# Altium PCB EFR32xG1x_DISC_REF_DES_A00.PcbDoc (part 2 of 2)
Units mil, origin at the board's own origin, x right, y up, seen from the top; angles counter-clockwise.
Board outline 1181.1 x 1771.65 mil, 4 copper layers (Top Layer, Signal Layer 2, Signal Layer 3, Bottom Layer), stack 63.229 mil thick; 88 components, 86 nets, 332 pads, 389 vias.
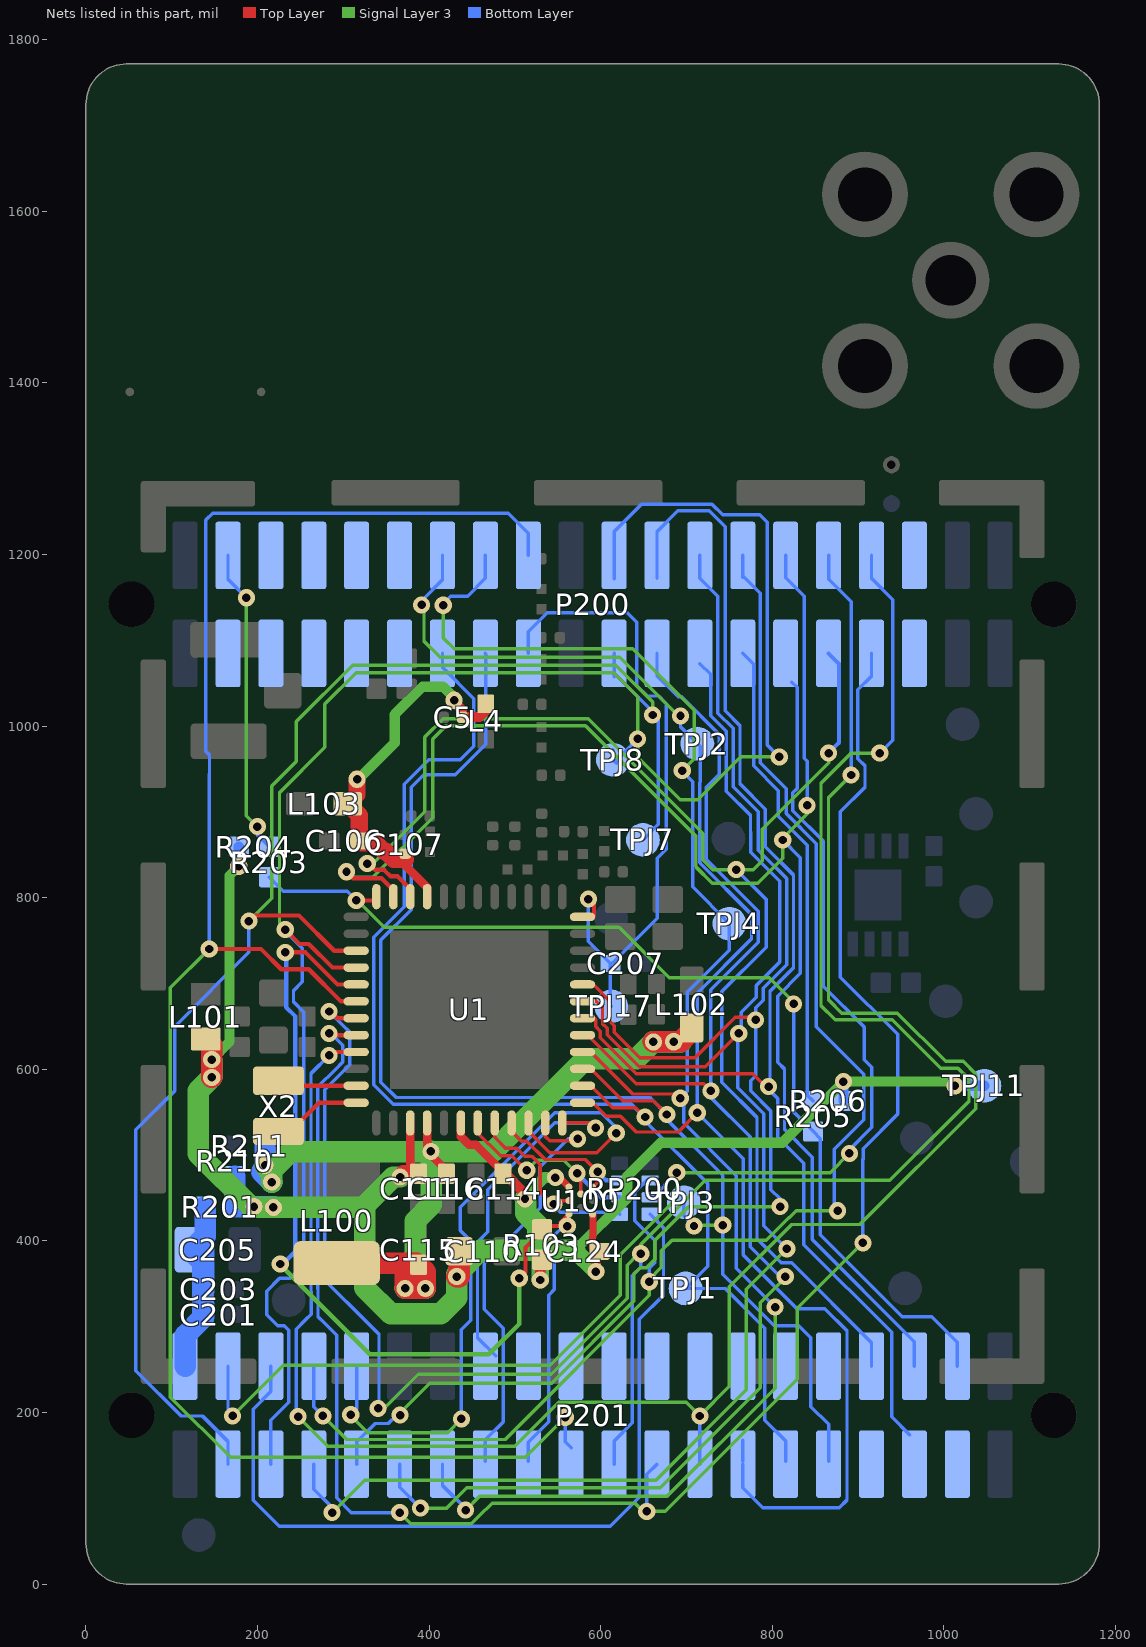
[diagram p4: the nets of this part, all layers, seen from the top]

## Via types
v1: diameter 20, hole 9.84, Top Layer to Bottom Layer, tented both sides, 385 vias
v2: diameter 19.68, hole 9.84, Top Layer to Bottom Layer, tented both sides, 2 vias
v3: diameter 20, hole 9.84, Top Layer to Bottom Layer, 2 vias

## Nets (pads, with @x,y where several pads share a name; then routed paths per layer and width w, separated by ;. In a path a pad name is that pad's centre, name@x,y a point inside that pad or via, vN(x,y) a via of type N, cw(c..) or ccw(c..) an arc to the next point about the centre after c; other vN are vias at no path point) (continued)
RADIO_PA2: P200.21 P201.3 TPJ7.1 U1.27 | length 1872.5
  Top Layer w5: v1(189.96,772.64) 196.62,779.3 248.26,779.3 289.37,738.19 U1.27@314.96,738.19
  Signal Layer 3 w4: v1(189.96,772.64) 216.54,799.21 216.54,930.12 245.08,958.66 245.08,1005.27 310.81,1071 617.48,1071 660.47,1028.01 v1(660.47,1012.84)
  Bottom Layer w4: P201.3@165.55,139.76 165.55,166.14 135.83,195.87 110.94,195.87 58.07,248.73 58.07,529.33 103.35,574.6 103.35,649.61 189.96,736.22 v1(189.96,772.64) ; P200.21@615.55,1057.68 P200.21@615.55,1061.61 ; P200.21@615.55,1084.65 P200.21@615.55,1061.61 ; TPJ7.1@649.21,867.32 657.73,875.84 657.48,876.1 667,885.62 667,1006.31 v1(660.47,1012.84) 660.47,1016.7 P200.21@615.55,1061.61
RADIO_PA3: P200.22 P201.5 TPJ8.1 U1.28 | length 2331
  Top Layer w5: v1(232.28,762.8) 249.02,746.06 259.76,746.06 287.32,718.5 U1.28@314.96,718.5
  Signal Layer 3 w4: v1(232.28,762.8) 225.59,769.48 225.59,922.44 278.54,975.39 278.54,1025.69 314.86,1062 615.17,1062 643,1034.17 v1(643,985) 643,963.69 692.69,914 713,914 763,964 v1(808,964)
  Bottom Layer w4: P201.5@215.55,139.76 215.55,191.13 236.12,211.7 236.12,287.4 ; v1@235.24,757.86 252.22,740.88 252.22,702.01 241.87,691.67 241.87,678.41 253.94,666.35 253.94,372.05 238.28,356.39 225.58,356.39 210.54,341.35 210.54,314.07 223.33,301.28 230.9,301.28 236.22,295.95 236.22,287.4 ; TPJ8.1@614.17,972.44 TPJ8.1@614.17,960.63 618.36,956.45 618.36,960.36 v1(643,985) ; P200.22@615.55,1171.85 P200.22@615.55,1198.82 615.55,1226.77 647.51,1258.73 729.64,1258.73 742.21,1246.16 785.34,1246.16 794.12,1237.38 794.12,977.88 v1(808,964)
RADIO_PA4: P201.17 R103.2 U1.29 U100.A3 | length 1280.2
  Top Layer w5: v1(232.28,736.22) 255.83,736.22 293.23,698.82 U1.29@314.96,698.82 ; v1(504.95,356.32) 512.41,363.78 512.41,392.33 531.5,411.42 R103.2@531.5,413.39 535.3,417.19 v1@557.14,417.19 ; v1(560.93,417.19) v1@557.14,417.19 ; U100.A3@562.91,431.1 553.07,421.26 v1@557.14,417.19
  Signal Layer 3 w5: v1(226.38,373.03) 226.38,372.05 330.71,267.72 469.5,267.72 504.95,303.16 v1(504.95,356.32)
  Bottom Layer w4: P201.17@515.55,143.11 515.55,165.16 539.37,188.98 539.37,253.47 ; 539.17,253.66 539.37,253.47 ; v1(560.93,417.19) 556.88,417.19 546.04,406.35 546.04,343.28 539.37,336.61 539.37,253.47
  Bottom Layer w5: v1@227.36,371.06 227.85,371.56 244.09,387.8 244.09,661.42 233.37,672.14 233.37,734.36 233.3,734.29 232.28,735.31 v1(232.28,736.22)
RADIO_PA5: P200.18 P201.19 U1.30 | length 2200.8
  Top Layer w5: v1(143.7,740.16) 204.07,740.16 227.7,716.54 259.76,716.54 297.17,679.13 U1.30@314.96,679.13
  Signal Layer 3 w4: v1(143.7,740.16) 98.43,694.88 98.43,217.85 168.63,147.64 511.81,147.64 v1(558.58,194.41)
  Bottom Layer w4: v1(143.7,740.16) 143.7,943.91 143.95,944.16 143.95,966.28 139.76,970.47 139.76,1240.16 147.64,1248.03 492.13,1248.03 515.55,1224.61 P200.18@515.55,1198.82 ; v1(558.58,194.41) 558.58,165.95 P201.19@565.55,158.98
RADIO_PB11: P200.34 P201.21 U1.31 | length 2490.7
  Top Layer w5: v1(283.39,667.32) 285.36,667.32 293.23,659.45 U1.31@314.96,659.45
  Signal Layer 3 w4: v1@344,201.28 387.3,244.59 542.08,244.59 630.78,333.29 630.78,371.78 643.86,384.86 v1(646.69,384.86) 646.69,395.7 721.54,470.55 937.01,470.55 1029.15,562.69 1029.15,588.58 1016.35,601.38 996.05,601.38 939.95,657.48 873.07,657.48 856.66,673.89 856.66,933.51 891.65,968.5 v1(925.2,968.5)
  Bottom Layer w4: v1(283.39,667.32) 299.39,651.32 299.47,651.32 307.39,643.4 307.39,605.13 278.54,576.28 278.54,354.24 303.6,329.18 303.69,329.18 341.54,291.34 341.54,205.71 v1(340.55,204.72) ; P201.21@615.55,139.76 615.55,166.73 636.81,187.99 636.81,359.25 646.69,369.13 v1(646.69,384.86) ; P200.34@915.55,1198.82 915.55,1172.09 940.21,1147.43 940.21,983.52 v1(925.2,968.5)
RADIO_PB12: P200.33 P201.23 U1.32 | length 2239.1
  Top Layer w5: v1(283.39,641.73) 285.35,639.76 U1.32@314.96,639.76
  Signal Layer 3 w4: v1(365.67,83.19) 378.68,70.14 449.08,70.14 453.74,74.8 458.44,79.51 473.3,94.36 639.89,94.36 653.54,80.71 v1(653.54,84.65) 675.2,84.65 829.23,238.68 829.23,321.36 v1(905.51,397.64)
  Bottom Layer w4: v1(283.39,641.73) v1@284.41,640.71 ; v1@285.43,641.73 285.61,641.73 299.39,627.95 299.39,608.44 291,600.05 270.29,579.35 270.29,344.39 270.42,344.26 270.42,311.76 277.3,304.87 292.19,289.98 292.19,100.44 309.44,83.19 v1(365.67,83.19) ; v1(653.54,84.65) 653.54,127.75 P201.23@665.55,139.76 ; v1(905.51,397.64) 905.51,495.09 905.76,495.34 905.76,507.56 946,547.79 946,640.61 879.2,707.42 879.2,899.86 907.99,928.65 907.99,953.74 899.73,962 899.73,1042.45 915.55,1058.27 P200.33@915.55,1084.65
RADIO_PB13: P200.32 P201.25 U1.33 | length 2362.4
  Top Layer w5: v1(283.39,616.14) 283.39,618.11 281.42,620.08 U1.33@314.96,620.08
  Signal Layer 3 w4: v1(247.31,195.1) 281.97,160.44 499.61,160.44 551.18,212.01 699.41,212.01 v1(715.55,195.87) 750,230.31 750,346.45 822.59,419.04 902.06,419.04 1037.15,554.13 1037.15,594.49 1022.26,609.38 1001.85,609.38 945.75,665.48 880.87,665.48 865.43,680.93 865.43,916.61 v1(891.73,942.91)
  Bottom Layer w4: v1@244.98,200.24 244.98,297.15 255.85,308.02 262.39,314.56 262.39,340.97 262.29,341.08 262.29,595.05 v1(283.39,616.14) ; P201.25@715.55,139.76 v1(715.55,195.87) ; P200.32@865.55,1198.82 865.55,1170.91 891.73,1144.73 v1(891.73,942.91)
RADIO_PB14: U1.35 X2.2 | length 93
  Top Layer w5: X2.2@224.33,586.61 230.24,580.71 U1.35@314.96,580.71
RADIO_PB15: U1.36 X2.1 | length 104.4
  Top Layer w5: X2.1@224.33,527.56 238.11,527.56 271.57,561.02 U1.36@314.96,561.02
RADIO_PC6: RP200.2 U1.43 U100.D2 | length 243.9
  Top Layer w4: U1.43@456.61,537.4 456.61,525.59 483.2,499 496.44,499 513.16,482.28 v1(513.7,482.28) ; v1(572.38,478.78) 576.69,474.46 U100.D2@576.69,454.72
  Signal Layer 3 w4: v1(513.7,482.28) 525.51,494.09 557.06,494.09 v1(572.38,478.78)
  Bottom Layer w5: v1(572.38,478.78) 600.37,450.79 RP200.2@622.05,450.79
RADIO_PC7: RP200.1 U1.44 U100.C3 | length 228.3
  Top Layer w4: U1.44@476.38,537.4 476.3,520.7 489,508 502,508 511.65,498.35 517.82,498.35 517.88,498.28 520.33,498.28 529.7,488.91 529.7,475.66 529.45,475.4 529.45,456.69 v1@537.32,448.82 ; v1(545.28,442.91) 549.21,446.85 U100.C3@562.91,446.85
  Bottom Layer w4: v1@544.25,441.89 552.95,433.19 619.96,433.19 RP200.1@622.05,431.1
RADIO_PC8: RP200.3 U1.45 U100.E1 | length 179.7
  Top Layer w4: U1.45@496.06,537.4 495.98,527.64 507.62,516 513.92,516 535.15,494.78 581.91,494.78 v1(596.38,480.31) 596.38,468.5 U100.E1@590.47,462.6
  Bottom Layer w5: v1(596.38,480.31) 606.22,470.47 RP200.3@622.05,470.47
RADIO_PC9: P201.10 U1.46 | length 831
  Top Layer w4: U1.46@515.75,537.4 515.75,527.56 540.53,502.78 595.22,502.78 v1(618.03,525.59)
  Signal Layer 3 w4: v1(308.58,197.36) 308.58,196.39 328.53,176.44 421.52,176.44 v1(437.52,192.44)
  Bottom Layer w4: v1(308.58,197.36) 315.55,204.33 P201.10@315.55,253.94 ; v1@437.52,194.26 437.52,296.58 448.32,307.38 448.32,400.11 436.38,412.05 436.38,439.33 546.26,549.21 600.39,549.21 618.03,531.57 v1(618.03,525.59)
RADIO_PC10: P201.15 U1.47 | length 501
  Top Layer w4: U1.47@535.43,537.4 535.43,521.57 540.36,516.64 570.88,516.64 v1(573.02,518.78)
  Bottom Layer w4: P201.15@465.55,143.11 465.55,168.31 486.12,188.87 486.12,298.33 464.32,320.13 464.32,373.76 529.28,438.72 529.28,475.23 529.7,475.66 529.7,486.39 562.09,518.78 v1(573.02,518.78)
RADIO_PC11: P201.16 U1.48 | length 409
  Top Layer w4: U1.48@555.04,537.4 U1.48@555.12,537.4 588.34,537.4 v1(594.03,531.71)
  Bottom Layer w4: P201.16@477.61,265.99 456.32,287.28 456.32,398.24 468.5,410.43 468.5,459.71 546.19,537.4 588.34,537.4 v1(594.03,531.71)
RADIO_PD13: P200.31 P201.34 U1.22 | length 1725.3
  Top Layer w5: v1(327.77,839.61) 329.62,839.61 336.88,832.35 347.53,832.35 354.87,825 363.03,825 377.87,810.16 U1.22@377.87,801.18
  Signal Layer 3 w4: v1(327.77,839.61) 334.47,839.61 395,900.14 395,987.21 416.29,1008.5 585.49,1008.5 719,875 719,844.41 730.73,832.68 v1(757.87,832.68) 777.6,832.68 788,843.08 788,879.66 865.55,957.21 v1(865.55,968.5)
  Bottom Layer w4: v1(757.87,832.68) 792.68,797.87 792.68,742.13 741.14,690.59 741.14,584.75 782.13,543.76 782.13,402.42 810.27,374.27 822.58,374.27 915.55,281.3 P201.34@915.55,253.94
  Bottom Layer w5: v1(865.55,968.5) 877.72,980.67 877.72,1072.48 P200.31@865.55,1084.65
RADIO_PD14: P200.30 P201.36 U1.23 | length 1893.4
  Top Layer w5: v1(303.68,830.18) 311.25,822.61 344.39,822.61 358.19,808.81 U1.23@358.27,801.18
  Signal Layer 3 w4: v1(303.68,830.18) 303.55,830.18 303.15,829.78 309.32,823.61 334.4,823.61 404,893.21 404,984.9 419.61,1000.5 582.18,1000.5 711,871.68 711,835.73 730.05,816.68 782.86,816.68 812.05,845.86 v1(812.05,867.17) 812.05,869.13 840.55,897.64 v1(840.55,907.48)
  Bottom Layer w4: v1(812.05,867.17) 832.68,846.54 832.68,711.76 806.1,685.18 806.1,608.27 814.13,600.24 814.13,529.88 846.46,497.55 846.46,401.57 965.55,282.48 P201.36@965.55,253.94 ; P200.30@815.55,1198.82 815.55,1172.9 836.98,1151.47 836.98,998.16 836.99,962.7 840.55,959.14 v1(840.55,907.48)
RADIO_PD15: P201.38 R203.1 R205.1 U1.24 | length 1220.3
  Top Layer w5: v1(314.96,796.78) 334.1,796.78 U1.24@338.5,801.18
  Signal Layer 3 w4: v1(314.96,796.78) 316.12,796.78 347.57,765.33 621.24,765.33 679.94,706.63 796.32,706.63 824.8,678.15 v1(824.8,676.18)
  Bottom Layer w4: R203.1@213.58,823.82 230.06,807.34 304.4,807.34 v1(314.96,796.78) ; v1(824.8,676.18) 824.8,550.2 R205.1@847.44,527.56 855.85,519.15 855.85,407.03 951.35,311.54 985.75,311.54 1015.55,281.73 P201.38@1015.55,253.94
RADIO_PF0: P200.14 P201.27 TPJ2.1 U1.1 | length 1856.4
  Top Layer w4: U1.1@578.66,561.02 U1.1@578.74,561.02 590.47,561.02 606.22,545.28 623,545.28 641.44,526.84 690.14,526.84 v1(712.52,549.21)
  Signal Layer 3 w4: v1@390,1141 394,1137 394,1099 413,1080 622,1080 690.19,1011.81 v1(692.91,1011.81)
  Bottom Layer w4: v1(391.26,1141.26) 391.26,1146.18 415.55,1170.47 P200.14@415.55,1198.82 ; v1(692.91,1011.81) 692.91,999.21 TPJ2.1@712.6,979.53 715.8,976.32 715.8,934.85 715.13,934.18 715.13,841.48 715.8,840.81 715.8,840.21 775.69,780.32 775.69,751.97 712.35,688.63 712.35,549.39 v1(712.52,549.21) 766.13,495.6 766.13,383.48 828.74,320.87 861.31,320.87 886.98,295.19 886.98,97.95 878.13,89.1 788.9,89.1 765.55,112.44 P201.27@765.55,139.76 ; P201.27@765.55,143.11 P201.27@765.55,167.52
RADIO_PF1: P200.13 P201.29 TPJ1.1 U1.2 | length 1524.2
  Top Layer w4: U1.2@578.74,580.71 588.5,580.71 614.09,555.12 640.83,555.12 v1(651.61,544.33)
  Bottom Layer w4: P200.13@415.55,1084.65 415.55,1068.45 452,1032 452,976.33 436.17,960.5 399.48,960.5 371.06,932.09 371.06,789.37 335.63,753.94 335.63,581.69 358.27,559.06 635.83,559.06 v1@651.57,543.31 ; v1@651.5,543.31 651.5,539.97 724.66,466.8 724.66,370.33 TPJ1.1@698.82,344.49 745.13,344.49 791.34,298.28 791.34,190.94 815.55,166.73 P201.29@815.55,143.11
RADIO_PF2: P200.15 P201.31 TPJ3.1 U1.3 | length 1607.1
  Top Layer w4: U1.3@578.74,600.39 588.5,600.39 625.78,563.12 661.32,563.12 v1(677.16,547.24)
  Signal Layer 3 w4: v1(708.66,417.32) 709.8,418.46 709.96,418.31 v1(742.13,418.31)
  Bottom Layer w4: P200.15@465.55,1084.65 466,1084.2 466,979.01 430.28,943.29 393.58,943.29 379.06,928.77 379.06,786.06 343.63,750.62 343.63,585.01 361.58,567.06 657.35,567.06 659.45,564.96 v1(677.16,547.24) 677.16,541.35 742.13,476.39 v1(742.13,418.31) 742.13,361.23 802.08,301.28 830.9,301.28 844.98,287.19 844.98,206.6 865.55,186.03 P201.31@865.55,143.11 ; TPJ3.1@696.85,444.88 696.85,429.13 v1(708.66,417.32)
RADIO_PF3: P200.16 P201.13 TPJ4.1 U1.4 | length 1964.2
  Top Layer w4: U1.4@578.66,620.08 U1.4@578.74,620.08 588.5,620.08 637.46,571.12 687.65,571.12 v1(692.64,566.12)
  Signal Layer 3 w4: v1@416.36,1140.64 416.36,1102.64 429,1090 637.35,1090 708.91,1018.44 708.91,961.91 v1(695,948) ; v1(442.44,86.14) 458.66,102.36 677.17,102.36 803.15,228.34 v1(803.15,322.83)
  Bottom Layer w4: P201.13@415.55,139.76 415.55,114.89 442.44,88 v1(442.44,86.14) ; v1(416.36,1140.8) 416.36,1142.74 425.1,1151.48 444.79,1151.48 465.55,1172.24 P200.16@465.55,1198.82 ; v1(695,948) 695,947.36 707.13,935.22 707.13,812.55 TPJ4.1@750,769.68 750,738.92 701.04,689.96 701.04,574.52 v1(692.64,566.12) 696.52,562.25 696.52,537.4 758.13,475.79 758.13,367.86 v1(803.15,322.83)
RADIO_PF4: P200.23 P201.11 U1.5 | length 1687.3
  Top Layer w4: U1.5@578.66,639.76 U1.5@578.74,639.76 584.65,639.76 641.16,583.25 719.9,583.25 v1(728.35,574.8)
  Signal Layer 3 w4: v1(389.76,88.58) 420.28,88.58 443.9,112.2 669.29,112.2 785.69,228.61 785.69,328.01 815.95,358.27 v1(814.96,358.27)
  Bottom Layer w4: P201.11@365.55,139.76 365.55,112.8 v1(389.76,88.58) ; P200.23@665.55,1084.65 665.55,1058.86 690.19,1034.22 694.23,1034.22 738.28,990.17 738.28,943.68 723.13,928.53 723.13,844.79 783.69,784.24 783.69,748.03 728.35,692.69 v1(728.35,574.8) ; v1@728.52,574.8 728.52,566.93 774.13,521.32 774.13,393.2 809.06,358.27 v1(814.96,358.27)
RADIO_PF5: P200.24 P201.35 U1.6 | length 1579.2
  Top Layer w4: U1.6@582.68,661.42 590.58,661.42 594,658 594,649.79 599.5,644.29 599.5,636.72 641.53,594.69 777.35,594.69 792.27,579.78 v1(795.62,579.78)
  Bottom Layer w4: P200.24@665.55,1172.09 P200.24@665.55,1198.82 665.55,1226.57 689.71,1250.73 726.32,1250.73 744.98,1232.07 744.98,1017.8 762.28,1000.5 762.28,932.59 791.69,903.19 791.69,859.39 824.68,826.4 824.68,718.38 797.28,690.98 797.28,581.44 v1(795.62,579.78) 795.62,576.43 806.13,565.92 806.13,520.67 836.5,490.29 836.5,395.67 938.92,293.25 938.92,194.98 P201.35@960.16,173.74
RADIO_PF6: P200.25 P201.7 U1.7 | length 1801.9
  Top Layer w4: U1.7@578.66,679.13 U1.7@578.74,679.13 594.87,679.13 602,672 602,653.11 607.5,647.6 607.5,640.03 644.84,602.69 721.79,602.69 v1(760.83,641.73)
  Signal Layer 3 w4: v1(286.81,83.19) 324.69,121.06 664.37,121.06 769.69,226.38 769.69,343.5 v1(816.93,390.75)
  Bottom Layer w4: P201.7@265.55,139.76 265.55,110.43 286.81,89.17 v1(286.81,83.19) ; P200.25@715.55,1072.83 728.12,1060.27 728.12,1012.04 746.28,993.87 746.28,924.02 774.5,895.8 774.5,876.09 774.61,875.98 774.61,853.09 808.68,819.02 808.68,725.01 781.28,697.61 781.28,683.85 763.78,666.35 763.78,644.68 v1(760.83,641.73) 759.46,640.37 759.46,578.64 790.13,547.98 790.13,417.55 v1(816.93,390.75)
RADIO_PF7: P200.26 P201.9 U1.8 | length 1777.6
  Top Layer w4: v1@364.17,198.82 v1(366.14,196.85) ; U1.8@578.74,698.82 591.18,698.82 610,680 610,656.42 615.5,650.91 615.5,643.34 645.46,613.39 709.86,613.39 756.9,660.43 777.56,660.43 v1(780.51,657.48)
  Signal Layer 3 w4: v1(366.14,196.85) 366.14,199.63 400.77,234.25 543.06,234.25 638.78,329.98 638.78,361.69 645.95,368.86 653.31,368.86 662.69,378.23 662.69,400.39 702.26,439.96 v1(809.06,439.96)
  Bottom Layer w4: P201.9@315.55,139.76 315.55,165.69 336.96,187.1 352.46,187.1 362.2,196.85 v1(366.14,196.85) ; P200.26@715.55,1198.82 715.55,1172.28 736.47,1151.36 736.47,1015 754.28,997.19 754.28,929.27 783.69,899.87 783.69,855.33 816.68,822.34 816.68,721.69 789.28,694.3 789.28,680.54 780.51,671.77 v1(780.51,657.48) 780.51,592.52 774.61,586.61 774.61,574.81 798.13,551.29 798.13,459.75 809.06,448.82 v1(809.06,439.96)
USB_VBUS: P200.35
USB_VREG: P200.36
VBIAS: C5.1 C106.1 C107.1 L4.1 L103.2 U1.21 | length 436.9
  Top Layer w8: C5.1@438,1010.65 C5.1@438.65,1010 C5.1@438.82,1010.17 ; C5.1@439,1010 439.17,1010.17 C5.1@439.64,1010.64
  Top Layer w10: 369.55,840.02 397.56,812.01 U1.21@397.56,801.18
  Top Layer w12: v1(429,1030) 429,1028 438,1019 C5.1@438,1010.65 ; C5.1@438.82,1010.17 C5.1@439.17,1010.17 ; C5.1@439.64,1010.64 458.64,1010.64 466,1018 L4.1@466,1026
  Top Layer w20: v1(315.94,937.99) 315.94,920.28 L103.2@305.12,909.45 318.52,896.05 318.52,866.52 C106.1@318.9,866.14 321.43,863.61 337.71,863.61 347.21,854.11 349.1,854.11 358.72,844.49 372.05,844.49
  Signal Layer 3 w12: v1@317.57,937.98 360,980.4 360,1013.54 392.23,1045.77 416.23,1045.77 v1@428,1034
VDCDC: C115.1 C116.1 L100.2 L102.1 R211.2 U1.40 | length 1146.8
  Top Layer w10: U1.40@397.56,537.4 v1@397.56,504.78 ; v1(401.96,504.16) 401.34,504.78 v1@397.56,504.78 ; C116.1@420.28,478.35 420.28,482.06 v1@397.56,504.78
  Top Layer w25: L100.2@291.26,374.02 C115.1@385.75,374.02 ; v1(661.42,631.89) v1@693,631.89 ; v1(685,632) 692.95,632 706,645.05 L102.1@706,648 ; C115.1@385.75,374.02 395.59,364.17 v1(395.59,344.49) v1(371.97,344.49) 371.97,360.24 C115.1@385.75,374.02
  Signal Layer 3 w25: v1(208.72,488.19) v1@216.54,476.38 ; v1(216.54,468.5) v1@216.54,476.38 ; v1@393.82,346.26 383.78,356.3 ; v1(395.59,344.49) v1(371.97,344.49) 383.78,356.3 ; v1@402.56,504.16 v1@402.56,503.94 ; v1@694.04,631.89 v1(661.42,631.89) 641.73,612.2 582.6,612.2 509.76,539.37 474.33,503.94 v1@402.56,503.94 ; v1@216.54,476.38 216.54,482.28 238.19,503.94 v1@402.56,503.94 ; 383.78,356.3 383.78,423.15 402.56,441.93 v1@402.56,503.94
  Bottom Layer w25: R211.2@208.66,510.83 208.72,506.89 v1(208.72,488.19) 204.72,480.31 v1(216.54,468.5)
VMCU: C110.1 C111.1 C114.1 C124.1 L101.1 R103.1 R201.2 R204.1 R206.1 R210.2 TPJ11.1 U1.39 U1.42 U100.A1 U100.E3 | length 2324.7
  Top Layer w8: v1(547.17,473.78) 551.73,473.78 U100.E3@562.91,462.6 ; U100.A1@590.47,431.1 590.93,430.65 590.93,404.76 590.47,404.31 590.47,391.73 C124.1@594.41,387.8
  Top Layer w10: U1.39@377.87,537.4 377.87,488.19 C111.1@387.72,478.35 ; U1.42@436.93,537.4 436.93,521.65 446.77,511.81 454.65,511.81 C114.1@486.14,480.31
  Top Layer w12: C114.1@486.14,480.31 511.73,454.73 v1(511.73,448.82) ; v1(529.53,354.33) 529.53,375.98 R103.1@531.5,377.95 ; v1(594.41,364.17) C124.1@594.41,387.8
  Top Layer w20: v1(366.06,474.41) 370,478.35 C111.1@387.72,478.35
  Top Layer w25: L101.1@139.76,635.24 146.65,628.35 v1(146.65,611.22) v1(146.65,590.55) ; v1(432.11,358.29) 435.02,358.29 C110.1@435.04,387.8
  Signal Layer 3 w12: v1(146.65,611.22) 167.32,631.89 167.32,825.79 v1(178.15,836.61) ; 527.56,388.78 529.53,386.81 ; 569.8,388.78 630.89,449.86 630.89,475.37 669.73,514.22 811.46,514.22 v1(882.87,585.63) 1007.87,585.63 v1(1012.8,580.71)
  Signal Layer 3 w13: v1(511.73,448.82) 511.73,451.32 534.19,473.78 v1(547.17,473.78)
  Signal Layer 3 w20: v1(529.53,354.33) 529.53,386.81 ; 569.8,388.78 v1(594.41,364.17)
  Signal Layer 3 w25: v1(146.65,611.22) v1(146.65,590.55) 130.91,574.8 130.91,501.31 192.26,439.96 v1(195.87,439.96) 196.85,438.98 v1(218.5,438.98) 322.68,438.98 324.72,441.02 ; v1(366.06,474.41) 358.11,474.41 324.72,441.02 ; v1(511.73,448.82) 512.64,447.91 512.64,432.16 526.57,418.23 526.57,402.41 527.56,401.42 527.56,388.78 ; 569.8,388.78 527.56,388.78 ; 324.72,441.02 324.72,345.47 355.24,314.96 413.39,314.96 432.11,333.68 v1(432.11,358.29) 432.11,361.24 459.65,388.78 527.56,388.78
  Bottom Layer w12: v1(178.15,836.61) R204.1@178.15,859.25 ; R206.1@882.87,562.99 v1(882.87,585.63) ; v1(1012.8,580.71) TPJ11.1@1047.24,580.71
  Bottom Layer w25: R210.2@173.23,475.39 173.23,440.94 R201.2@174.21,439.96 v1(195.87,439.96) ; v1@199.73,439.96 v1(195.87,439.96) ; v1(218.5,438.98) 217.98,439.5 195.87,439.5 v1(195.87,439.96)
VMCU_IN: C201.1 C203.1 C205.1 P201.2 R201.1 | length 285.6
  Bottom Layer w25: P201.2@115.55,253.94 115.55,289.76 C201.1@137.32,311.54 ; 137.32,325.79 C201.1@137.32,311.54 ; C205.1@137.8,403.54 137.32,403.07 137.32,342.05 C203.1@136.34,341.06 ; R201.1@138.78,439.96 138.78,405.51 122.05,388.78 136.34,374.49 C203.1@136.34,341.06 ; C203.1@136.34,341.06 136.34,312.52 C201.1@137.32,311.54
WSTK_F4: C207.1 P200.17 TPJ17.1 U1.12 | length 785.8
  Top Layer w5: U1.12@578.66,777.56 U1.12@578.74,777.64 ; U1.12@578.74,777.56 591.56,777.56 592,778 592,791.93 v1(585.66,798.27)
  Bottom Layer w4: P200.17@515.55,1084.65 515.55,1110.04 537.5,1131.98 630.9,1131.98 642.11,1120.77 642.11,1046.87 653.98,1035 667.51,1035 676.47,1026.04 676.47,856.17 665.96,845.66 665.96,776.2 613.19,723.43 C207.1@611.22,723.43 ; v1(585.66,798.27) 585.66,748.99 C207.1@611.22,723.43 ; TPJ17.1@612.2,673.23 611.22,674.21 C207.1@611.22,723.43
WSTK_F14: P200.27 R205.2 R206.2 | length 555.6
  Bottom Layer w4: P200.27@765.55,1084.65 778.12,1072.08 778.12,953.68 807.09,924.71 807.09,894.76 840.68,861.17 840.68,685.17 840.8,685.04 840.8,569.63 R205.2@847.44,562.99
WSTK_F15: P200.28 P201.8 RP200.6 | length 1785.7
  Signal Layer 3 w4: v1(276.19,196.01) 303.76,168.44 488.56,168.44 656.53,336.41 v1(656.53,352.38) 656.53,354.87 670.69,369.03 670.69,388.2 683.07,400.59 792.82,400.59 819.27,427.04 819.75,427.04 827.75,435.04 v1(875.98,435.04)
  Bottom Layer w4: P201.8@265.55,253.94 265.55,206.65 v1(276.19,196.01) ; v1(656.53,352.38) 656.53,368.14 662.69,374.3 662.69,400.62 639.76,423.54 639.76,456.61 653.62,470.47 RP200.6@657.48,470.47 ; P200.28@765.55,1173.47 P200.28@765.55,1175.39 ; P200.28@765.55,1198.82 P200.28@765.55,1175.39 ; v1(875.98,435.04) 872.05,438.97 872.05,506.88 906.5,541.33 906.5,594.36 851.38,649.48 851.38,862.71 816.01,898.08 816.01,927.1 786.12,956.99 786.12,1154.83 P200.28@765.55,1175.39
WSTK_F16: P200.29 P201.4 RP200.7 | length 1597.5
  Signal Layer 3 w4: v1(170.87,196.01) 230.05,255.19 541.37,255.19 622.78,336.6 622.78,383.58 688.61,449.42 v1(688.61,479.49) 867.29,479.49 v1(889.76,501.97)
  Bottom Layer w4: P201.4@165.55,253.94 165.55,201.33 v1(170.87,196.01) ; RP200.7@657.48,450.79 661.34,450.79 674.68,464.14 674.68,465.56 v1(688.61,479.49) ; P200.29@822.83,1051.18 828.98,1045.03 828.98,994.85 ; 828.99,994.84 828.99,927.23 824.01,922.24 824.01,901.4 859.38,866.03 859.38,696.82 907,649.2 907,611.26 916,602.26 916,532.14 889.76,505.91 v1(889.76,501.97)
WSTK_P3: P201.6 RP200.8 | length 989.7
  Bottom Layer w4: P201.6@215.55,253.94 215.55,224.41 194.98,203.84 194.98,97.65 225.44,67.19 611.22,67.19 644.98,100.95 644.98,308.37 673.13,336.52 673.13,415.45 RP200.8@657.48,431.1
WSTK_P15: P201.18
WSTK_P17: P201.20
WSTK_P19: P201.22
WSTK_P21: P201.24
WSTK_P23: P201.26
WSTK_P25: P201.28
WSTK_P27: P201.30
WSTK_P29: P201.32
WSTK_P30: P201.33
WSTK_P34: P201.37
WSTK_P36: P200.3
WSTK_P37: P200.4 R203.2 R204.2 | length 359.5
  Signal Layer 3 w4: v1(187.01,1149.61) 187.01,895.67 v1(199.8,882.87)
  Bottom Layer w4: P200.4@165.55,1198.82 165.55,1171.06 v1(187.01,1149.61) ; v1(199.8,882.87) 199.8,873.03 R204.2@213.58,859.25
WSTK_P38: P200.5
WSTK_P39: P200.6
WSTK_P40: P200.7
WSTK_P41: P200.8
WSTK_P42: P200.9
WSTK_P43: P200.10
WSTK_P44: P200.11
WSTK_P45: P200.12
pads on no net: P200.M1 P200.M2 P201.40 P201.M1 P201.M2 RP200.4 RP200.5 TPJ9.1 TPJ18.1 TPJ19.1 TPJ20.1 U1.49@401.57,624.02 U1.49@401.57,714.57 U1.49@492.13,624.02 U1.49@492.13,714.57 U100.C1 U200.9

## Polygon pours and split planes (outlines as drawn)
GND on Signal Layer 2 "GND_L2" (solid, remove dead copper, pour order 27): 24,1365 826.55,1365 ccw(c826.55,1399.14) 860.69,1399.14 860.69,1597.28 931.56,1668.15 1085.1,1668.15 1155.97,1597.28 1155.89,46.7 cw(c1133.64,46.7) 1133.64,24.45 49.59,24.66 cw(c49.59,50.25) 24,50.25
GND on Bottom Layer "GND_L4" (solid, remove dead copper, pour order 24): 24,1365 826.55,1365 ccw(c826.55,1399.14) 860.69,1399.14 860.69,1597.28 931.56,1668.15 1085.1,1668.15 1155.97,1597.28 1155.89,46.7 cw(c1133.64,46.7) 1133.64,24.45 49.59,24.66 cw(c49.59,50.25) 24,50.25
GND on Signal Layer 3 "GND_L3" (solid, remove dead copper, pour order 25): 24,1365 826.55,1365 ccw(c826.55,1399.14) 860.69,1399.14 860.69,1597.28 931.56,1668.15 1085.1,1668.15 1155.97,1597.28 1155.89,46.7 cw(c1133.64,46.7) 1133.64,24.45 49.59,24.66 cw(c49.59,50.25) 24,50.25
GND on Top Layer "GND_L1" (solid, remove dead copper, pour order 29): 24,1365 826.55,1365 ccw(c826.55,1399.14) 860.69,1399.14 860.69,1597.28 931.56,1668.15 1085.1,1668.15 1155.97,1597.28 1155.89,46.7 cw(c1133.64,46.7) 1133.64,24.45 49.59,24.66 cw(c49.59,50.25) 24,50.25

## Other copper
Top Layer:
  pour cut-out: 511,935 597,935 619.96,912.04 620.15,862.89 619,860.38 619,817.28 581,790 571.81,790 556,774.18 556,564 546,553 408,553 404,549 404,429 400,425 323,425 319,429 319,854.55 330.59,866.14 451,866.14 451,912.62 476.57,935
Signal Layer 2:
  pour cut-out: 477.54,935 597,935 619.85,912.15 620.02,864.05 619,861.6 619,818.31 596.47,800 573,780 486.02,780 481.65,784.99 480.28,812.44 451,835.14 451,913.14
  region net GND: 439,932
  region net GND: 439,932
  pour cut-out: 119.95,1075.03 119.95,1008.1 201.92,1008.1 201.92,1018.67 252.95,1018.7 252.95,1064.7 201.95,1064.7 201.95,1075
Signal Layer 3:
  pour cut-out: 477.36,935 597,935 619.85,912.15 620.02,864.05 619,861.6 619,818.09 607,809 573,780 486.38,780 481.57,785.49 480.23,812.48 451,835.14 451,913.29
  pour cut-out: 595,948
  pour cut-out: 499,935
  pour cut-out: 439,944
Bottom Layer:
  pour cut-out: 938.78,1336.02 cw(c938.78,1304.53) 970.28,1304.53 cw(c938.78,1304.53) 938.78,1273.03 cw(c938.78,1304.53) 907.28,1304.53 cw(c938.78,1304.53)

## Silkscreen, mask and mechanical layers (free items; w line width, h text height)
Top Overlay:
  text "EFR32xG1x_DISC_REF_DES" at 3,1625 h68
  text "2.4GHz/Sub-GHz" at 39,1544 h74.8
  text "SubG match Layout  3" at 39,1465 h74.8
  text "EFR32FG14" at 388,88 h74.8
Bottom Overlay:
  lines w6: 155.51,469.49 155.51,457.68 167.32,457.68 ; 155.51,518.7 155.51,530.51 167.32,530.51 ; 160.43,852.36 160.43,840.55 172.24,840.55 ; 160.43,866.14 160.43,877.95 172.24,877.95 ; 181.1,457.68 192.91,457.68 192.91,469.49 ; 182.09,840.55 193.9,840.55 193.9,828.74 ; 192.91,479.33 192.91,491.14 204.72,491.14 ; 193.9,816.93 193.9,804.13 205.71,804.13 ; 216.54,491.14 229.33,491.14 229.33,502.95 ; 216.54,530.51 229.33,530.51 229.33,518.7 ; 221.46,804.13 233.27,804.13 233.27,816.93 ; 221.46,877.95 233.27,877.95 233.27,866.14 ; 829.72,521.65 829.72,509.84 841.54,509.84 ; 829.72,570.87 829.72,582.68 841.54,582.68 ; 855.32,509.84 867.13,509.84 867.13,521.65 ; 867.13,531.5 867.13,543.31 878.94,543.31 ; 890.75,543.31 903.54,543.31 903.54,555.12 ; 890.75,582.68 903.54,582.68 903.54,570.87
  text "BOARD  INFO" at 809.06,1706.69 h62.99
  text "EFR32xG1x_DISC_REF_DES_A00" at 874,1507 h60
  text "Sensor Enable" at 375.98,898.62 h62.99
  text "ON" at 149.61,845.47 h47.24
  text "PD15" at 342.52,839.57 h47.24
  text "Disp Enable" at 995.08,595.47 h62.99
  text "ON" at 968.5,549.21 h47.24
  text "PAVDD" at 259.84,545.28 h62.99
  text "PD15" at 815,535 h47.24
  text "VDCDC" at 377.95,496.06 h47.24
  text "VMCU" at 150.59,490.16 h47.24
Top Solder:
  the board outline again, w39.37
Bottom Solder:
  the board outline again, w39.37
BOARD OUTLINE 1:
  the board outline again, w3.94
Mechanical 2:
  lines w3.94: -19.68,0 19.69,0 ; 0,-19.69 0,19.68
Mechanical 11:
  the board outline again, w3.94
Mechanical 12:
  the board outline again, w3.94
EXT_SILKP 20:
  lines w6: 155.51,469.49 155.51,457.68 167.32,457.68 ; 155.51,518.7 155.51,530.51 167.32,530.51 ; 160.43,852.36 160.43,840.55 172.24,840.55 ; 160.43,866.14 160.43,877.95 172.24,877.95 ; 181.1,457.68 192.91,457.68 192.91,469.49 ; 182.09,840.55 193.9,840.55 193.9,828.74 ; 192.91,479.33 192.91,491.14 204.72,491.14 ; 193.9,816.93 193.9,804.13 205.71,804.13 ; 216.54,491.14 229.33,491.14 229.33,502.95 ; 216.54,530.51 229.33,530.51 229.33,518.7 ; 221.46,804.13 233.27,804.13 233.27,816.93 ; 221.46,877.95 233.27,877.95 233.27,866.14 ; 829.72,521.65 829.72,509.84 841.54,509.84 ; 829.72,570.87 829.72,582.68 841.54,582.68 ; 855.31,509.84 867.13,509.84 867.13,521.65 ; 867.13,531.5 867.13,543.31 878.94,543.31 ; 890.75,543.31 903.54,543.31 903.54,555.12 ; 890.75,582.68 903.54,582.68 903.54,570.87
  lines w6.06: 59.06,1496.06 59.06,1456.69 98.43,1456.69 ; 59.06,1653.54 59.06,1692.91 98.43,1692.91 ; 767.72,1456.69 807.09,1456.69 807.09,1496.06 ; 767.72,1692.91 807.09,1692.91 807.09,1653.54
  text "BOARD INFO" at 809.06,1706.69 h60
  text "Sensor Enable" at 372.05,899.61 h60
  text "ON" at 149.61,845.47 h45
  text "WSTK_P37" at 451.77,827.76 h45
  text "Disp Enable" at 995.08,595.47 h60
  text "ON" at 968.5,549.21 h45
  text "PAVDD" at 269.68,547.24 h60
  text "WSTK_P35" at 824.8,530.51 h45
  text "VDCDC" at 377.95,496.06 h45
  text "VMCU" at 150.59,478.35 h45
Mechanical 26:
  lines w7.87: -4937.2,-1888.27 -4740.35,-1888.27 ; -4937.2,-37.87 -4740.35,-37.87 ; -4936.72,1812.52 -4740.35,1812.52 ; -2133.75,-3739.9 -2133.75,-3543.05 ; -2133.75,3543.57 -2133.75,3740.42 ; 673.33,-3739.9 673.33,-3543.05 ; 673.33,3543.57 673.33,3740.42 ; 3476.48,-3739.9 3476.48,-3543.05 ; 3476.48,3543.57 3476.48,3740.42 ; 6086.43,-1888.27 6283.28,-1888.27 ; 6086.43,-37.87 6283.28,-37.87 ; 6086.43,1812.52 6282.8,1812.52 ; -4936.72,-3739.9 6283.28,-3739.9 6283.28,3740.1 -4936.72,3740.1 -4936.72,-3739.9 ; -4740.35,-3543.05 6086.43,-3543.05 6086.43,3543.57 -4740.35,3543.57 -4740.35,-3543.05
  text "1" at -3641.91,3605.44 h60
  text "2" at -795.17,3605.44 h60
  text "3" at 2063.1,3605.44 h60
  text "4" at 4850.5,3605.44 h60
  text "D" at 6165.09,2851.89 h60
  text "D" at -4862.91,2804.44 h60
  text "C" at -4862.91,934.57 h60
  text "C" at 6160.09,934.57 h60
  text "B" at -4862.91,-939.45 h60
  text "B" at 6160.09,-939.45 h60
  text "A" at -4862.91,-2809.53 h60
  text "A" at 6160.09,-2809.53 h60
  text "1" at -3593.91,-3678.56 h60
  text "2" at -795.17,-3678.56 h60
  text "3" at 2051.28,-3678.56 h60
  text "4" at 4834.75,-3678.56 h60
Mechanical 27:
  circle w10: c1520.59,-3267.52 r116.62
  circle w6: c2779.83,-2698.37 r70
  circle w6: c2779.83,-2698.37 r30
  lines w6: 2346.83,-2698.37 2636.83,-2698.37 ; 2689.83,-2698.37 2869.83,-2698.37 ; 2376.83,-2728.37 2376.83,-2668.37 2606.83,-2628.37 2605.83,-2768.37 2376.83,-2728.37
  lines w7.87: 1361.21,-3540.52 1361.21,-2483.05 2936.56,-2483.05 ; 1361.21,-2980.52 6084.21,-2980.52 ; 1361.76,-2837.38 2936.56,-2837.38 ; 2160.21,-3538.52 2160.21,-2983.52 ; 2160.21,-2835.52 2160.21,-2484.52 ; 5298.76,-2979.52 5298.76,-2837.38 ; 5692.47,-2837.38 5692.47,-2483.05 ; 6086.17,-2837.38 2936.56,-2837.38 ; 6086.17,-2483.05 2936.56,-2483.05 ; 2936.56,-2837.38 2936.56,-2483.05
  text "SIZE" at 1440.5,-2561.79 h60
  text "DOC NO" at 3015.3,-2561.79 h60
  text "REV" at 5771.21,-2561.79 h60
  text "PROJECTION" at 2200.21,-2575.52 h60
  text "'.ProjectRevision'" at 5760.21,-2755.52 h100
  text "A4" at 1544.83,-2773.37 h100
  text "xxxx" at 3113.71,-2773.37 h100
  text "REF" at 1440.5,-2916.12 h60
  text "SHEET" at 5338.13,-2916.12 h60
  text "1 of 2" at 5725.6,-2956.95 h60
  text "This drawing is confidential and is supplied on the express" at 2179.21,-3097.52 h60
  text "condition that it shall not be loaned, copied or disclosed to any" at 2179.21,-3197.52 h60
  text "other person or used for any purpose without the written consent of" at 2179.21,-3297.52 h60
  text "C" at 1497.21,-3307.52 h80
  text "2017" at 1697.21,-3313.52 h100
  text "SILICON LABS" at 2196.21,-3466.52 h100
Mechanical 28:
  lines w7.87: -4937.15,-1888.32 -4740.3,-1888.32 ; -4937.15,-37.92 -4740.3,-37.92 ; -4936.68,1812.47 -4740.3,1812.47 ; 6086.47,-1888.32 6283.32,-1888.32 ; 6086.47,1812.47 6283.32,1812.47
  lines w8: -4741.3,-3543.09 -4741.3,3543.52 ; -4740.3,-3543.09 6086.47,-3543.09 6086.47,3543.52 -4740.3,3543.52 ; -2133.71,-3739.95 -2133.71,-3543.09 ; -2133.71,3543.52 -2133.71,3740.37 ; 673.38,-3739.95 673.38,-3543.09 ; 673.38,3543.52 673.38,3740.37 ; 3476.53,-3739.95 3476.53,-3543.09 ; 3476.53,3543.52 3476.53,3740.37 ; -4936.68,-3739.95 6283.32,-3739.95 6283.32,3740.05 -4936.68,3740.05 -4936.68,-3739.95
  text "4" at -3601.87,3605.39 h60
  text "3" at -755.13,3605.39 h60
  text "2" at 2103.14,3605.39 h60
  text "1" at 4890.54,3605.39 h60
  text "D" at 6205.13,2851.84 h60
  text "D" at -4822.87,2804.39 h60
  text "C" at -4822.87,934.52 h60
  text "C" at 6205.13,871.53 h60
  text "B" at -4822.87,-939.5 h60
  text "B" at 6205.13,-982.8 h60
  text "A" at 6165.04,-2806.57 h60
  text "A" at -4822.87,-2809.57 h60
  text "A" at 6200.13,-2809.57 h60
  text "4" at -3553.87,-3678.61 h60
  text "3" at -755.13,-3678.61 h60
  text "2" at 2085.33,-3678.61 h60
  text "1" at 4874.8,-3678.61 h60
Mechanical 29:
  circle w10: c-167.95,-3270.05 r116.62
  circle w6: c-1427.2,-2700.9 r70
  circle w6: c-1427.2,-2700.9 r30
  lines w6: -1517.2,-2700.9 -1337.2,-2700.9 ; -1284.2,-2700.9 -994.2,-2700.9 ; -1254.2,-2630.9 -1024.2,-2670.9 -1024.2,-2730.9 -1253.2,-2770.9 -1254.2,-2630.9
  lines w7.87: -4733.53,-2839.91 -1583.93,-2839.91 ; -4733.53,-2485.58 -1583.93,-2485.58 ; -4731.57,-2983.05 -8.57,-2983.05 ; -4339.83,-2839.91 -4339.83,-2485.58 ; -3946.13,-2982.05 -3946.13,-2839.91 ; -807.57,-3541.05 -807.57,-2986.05 ; -807.57,-2838.05 -807.57,-2487.05 ; -9.12,-2839.91 -1583.93,-2839.91 ; -9.12,-2485.58 -1583.93,-2485.58 ; -8.57,-3543.05 -8.57,-2483.05 ; -1583.93,-2839.91 -1583.93,-2485.58
  text "REV" at -4418.57,-2564.32 h60
  text "DOC NO" at -1662.67,-2564.32 h60
  text "SIZE" at -87.87,-2564.32 h60
  text "PROJECTION" at -847.57,-2578.05 h60
  text "'.ProjectRevision'" at -4407.57,-2758.05 h100
  text "xxxx" at -1761.08,-2775.9 h100
  text "A4" at -192.2,-2775.9 h100
  text "SHEET" at -3985.5,-2918.65 h60
  text "REF" at -87.87,-2918.65 h60
  text "2 of 2" at -4366.92,-2956.95 h60
  text "This drawing is confidential and is supplied on the express" at -826.57,-3100.05 h60
  text "condition that it shall not be loaned, copied or disclosed to any" at -826.57,-3200.05 h60
  text "other person or used for any purpose without the written consent of" at -826.57,-3300.05 h60
  text "C" at -144.57,-3310.05 h80
  text "2017" at -344.57,-3316.05 h100
  text "SILICON LABS" at -843.57,-3469.05 h100
Mechanical 30:
  lines w7.87: 1361.21,-2483.05 1361.21,-1662.58 6085.62,-1662.58 ; 1361.21,-2328.09 2936.01,-2328.09 ; 1361.21,-2170.61 2936.01,-2170.61 6085.62,-2170.65 ; 1361.21,-2013.13 2936.01,-2013.13 ; 2936.01,-1855.65 6085.62,-1855.65 ; 2936.28,-2483.05 2936.28,-1662.58 ; 2936.28,-1662.18 2936.28,-1377.95 6087.58,-1377.95
  text "EFR32FG14 Discrete Balun 434/915MHz 20dBm" at 2992.13,-1496.06 h70.87
  text "CUSTOMER" at 2979.65,-1738.05 h50
  text "PROJECT NO" at 1419.65,-1778.05 h60
  text "SILICON LABS" at 3666.34,-1811.02 h98.43
  text "DRAWING TITLE" at 2988.65,-1932.05 h60
  text "xxxx" at 1419.4,-1938.98 h82.68
  text "DATE" at 1419.65,-2098.05 h60
  text "EFR32 Sub-GHz Discrete Balun Reference" at 2985.24,-2099.41 h70.87
  text "'.Print_Date'" at 2139.65,-2138.05 h60
  text "SHEET NAME" at 2980.65,-2253.05 h60
  text "DRAWN" at 1419.65,-2258.05 h60
  text "CHECK" at 1419.65,-2418.05 h60

## Text inside footprints (layer, text, board x,y; h text height)
Designator16: Mechanical 31 ":" at 3598.66,23395.65 h90.55; Mechanical 31 "Materials in compliance with the RoHS and WEEE directives" at 3756.14,28592.5 h90.55; Mechanical 31 "Glass Epoxy FR-4, NEMA Class 2, UL 94V-0, Tg min 150 C" at 3756.14,28749.98 h90.55; Mechanical 31 "is allowed" at 3756.14,27805.1 h90.55; Mechanical 31 "shall be put in the PCB frame. No marking on the boards" at 3756.14,27962.58 h90.55; Mechanical 31 "All PCB manufacturer’s markings (Logo, Week/Year, UL)" at 3756.14,28120.06 h90.55; Mechanical 31 "(Avoid areas reserved for DataMatrix, Barcodes or Lables)" at 3756.14,28277.54 h90.55; Mechanical 31 "Logo, Week/Year, UL (ON SECONDARY SIDE (BOT))" at 3756.14,28435.02 h90.55; Mechanical 31 "IPC-A-600 (current revisions) Class 2, and IPC specifications" at 3756.14,27647.62 h90.55; Mechanical 31 "refered to by IPC-A-600" at 3756.14,27490.14 h90.55; Mechanical 31 "otherwise." at 3756.14,25285.41 h90.55; Mechanical 31 "- Inner radius (contour/outline) 1.2 mm, unless stated" at 3756.14,25442.89 h90.55; Mechanical 31 "Use of V-CUT test pads is allowed." at 3756.14,25600.37 h90.55; Mechanical 31 "V-CUT minimum remaining thickness 0.5 +/- 0.1 mm." at 3756.14,25757.85 h90.55; Mechanical 31 "- If V-CUT, use angle 30 +/- 5 degrees." at 3756.14,25915.33 h90.55; Mechanical 31 "by manufacturer for QA purposes." at 3756.14,26072.81 h90.55; Mechanical 31 "- Break-away areas may be used for patterns, holes etc." at 3756.14,26230.29 h90.55; Mechanical 31 "otherwise use (board manufacturer) standard Build-Up." at 3756.14,26387.77 h90.55; Mechanical 31 "- If Build-Up (Stack-Up) is specified, follow Build-Up," at 3756.14,26545.25 h90.55; Mechanical 31 "If applicable, the following requirements are valid:" at 3756.14,26702.73 h90.55; Mechanical 31 "Gerber files (without alterations)" at 3756.14,26860.22 h90.55; Mechanical 31 "Use the balancing of the panel that comes with the" at 3756.14,27017.7 h90.55; Mechanical 31 "outline(s), without written consent/approval." at 3756.14,27175.18 h90.55; Mechanical 31 "- Copper must not be added or removed from inside the board" at 3756.14,27332.66 h90.55; Mechanical 31 "(Electroless Nickel/Immersion Gold)" at 3756.14,24812.97 h90.55; Mechanical 31 "ENIG to meet IPC-4552 requirements (current revision)" at 3756.14,24970.45 h90.55; Mechanical 31 "Thickness minimum 8 um, maximum 20 um" at 3756.14,24183.05 h90.55; Mechanical 31 "to IPC-SM-840 Class T requirements (current revision)" at 3756.14,24340.53 h90.55; Mechanical 31 "Photo Polymer Wet film" at 3756.14,24498.01 h90.55; Mechanical 31 "Solder Mask Color: BLACK (NB! NON-STANDARD)" at 3756.14,24655.49 h90.55; Mechanical 31 "PLUGGED/FILLED, IPC-4761 (current revision) Type IV-b" at 3756.14,24025.57 h90.55; Mechanical 31 "Plugged and Covered Both Sides, Low CTE Plugging Paste" at 3756.14,23868.09 h90.55; Mechanical 31 "If Type IV-b is not available as a process, then Type IV-a" at 3756.14,23710.61 h90.55; Mechanical 31 "for the Top Side, and Overprinted (Tented) Bot Side is OK" at 3756.14,23553.13 h90.55; Mechanical 31 "hence normally not required." at 3756.14,22765.73 h90.55; Mechanical 31 "has been designed into the board. Use of test strip is" at 3756.14,22923.21 h90.55; Mechanical 31 "Unless explicitly stated otherwise, controlled impedance" at 3756.14,23080.69 h90.55; Mechanical 31 "Design has Controlled impedances. FOLLOW BUILD-UP STRICTLY!" at 3756.14,23238.17 h90.55; Mechanical 31 "Min via hole may have more than one pad diameter." at 3756.14,21820.85 h90.55; Mechanical 31 "Minimum via hole diameter   : 0.25 mm (9.8 mils)" at 3756.14,21978.33 h90.55; Mechanical 31 "Minimum via pad diameter    : 0.51 mm (20 mils)" at 3756.14,22135.81 h90.55; Mechanical 31 ":" at 3598.66,22135.81 h90.55; Mechanical 31 "MINIMUM VIA" at 2181.34,22135.81 h90.55; Mechanical 31 ":" at 3598.66,22293.29 h90.55; Mechanical 31 "Minimum conductor spacing   : 0.10 mm (4 mils)" at 3756.14,22293.29 h90.55; Mechanical 31 "Minimum conductor width     : 0.10 mm (4 mils)" at 3756.14,22450.77 h90.55; Mechanical 31 ":" at 3598.66,22450.77 h90.55; Mechanical 31 "Cu TRACK(TRACE)" at 2181.34,22293.29 h90.55; Mechanical 31 "(SPECIFICATION CONTINUED ON NEXT PAGE)" at 2181.34,21505.88 h90.55; Mechanical 31 "NOMINAL VALUES for Width, Spacing and VIA Diameter:" at 2181.34,22608.25 h90.55; Mechanical 31 "CONTROLLED IMP" at 2181.34,23238.17 h90.55; Mechanical 31 ":" at 3598.66,23238.17 h90.55; Mechanical 31 "BOARD THICKNESS" at 2181.34,29064.94 h90.55; Mechanical 31 "BOARD SIZE" at 2181.34,29222.42 h90.55; Mechanical 31 "PANEL SIZE" at 2181.34,29379.9 h90.55; Mechanical 31 "BOARDS pr PANEL" at 2181.34,29537.38 h90.55; Mechanical 31 "PREPARED BY" at 2181.34,29694.86 h90.55; Mechanical 31 "-------------------------------------------------------------------------" at 2181.34,29852.34 h90.55; Mechanical 31 "REVISION" at 2181.34,30009.82 h90.55; Mechanical 31 "DATE" at 2181.34,30167.3 h90.55; Mechanical 31 "DOCUMENT/BOARD" at 2181.34,30482.26 h90.55; Mechanical 31 "PRODUCT OWNER" at 2181.34,30639.74 h90.55; Mechanical 31 ":" at 3598.66,29064.94 h90.55; Mechanical 31 ":" at 3598.66,27332.66 h90.55; Mechanical 31 ":" at 3598.66,27647.62 h90.55; Mechanical 31 ":" at 3598.66,28435.02 h90.55; Mechanical 31 ":" at 3598.66,28749.98 h90.55; Mechanical 31 ":" at 3598.66,28907.46 h90.55; Mechanical 31 "NO OF LAYERS" at 2181.34,28907.46 h90.55; Mechanical 31 "MATERIAL(S)" at 2181.34,28749.98 h90.55; Mechanical 31 "MARKINGS" at 2181.34,28435.02 h90.55; Mechanical 31 "QUALITY REQ." at 2181.34,27647.62 h90.55; Mechanical 31 "GENERAL REQ." at 2181.34,27332.66 h90.55; Mechanical 31 ":" at 3598.66,24025.57 h90.55; Mechanical 31 ":" at 3598.66,24655.49 h90.55; Mechanical 31 ":" at 3598.66,24970.45 h90.55; Mechanical 31 ":" at 3598.66,25127.93 h90.55; Mechanical 31 "COPPER THK." at 2181.34,25127.93 h90.55; Mechanical 31 "COPPER PASSIV." at 2181.34,24970.45 h90.55; Mechanical 31 "RESIST MASK" at 2181.34,24655.49 h90.55; Mechanical 31 "VIA HOLES" at 2181.34,24025.57 h90.55; Mechanical 31 "LEGEND/SILKSCR." at 2181.34,23395.65 h90.55; Mechanical 31 "SEE BUILD-UP" at 3756.14,25127.93 h90.55; Mechanical 31 "WHITE, BOTH SIDES (TOP + BOT)" at 3756.14,23395.65 h90.55; Mechanical 31 "4" at 3756.14,28907.46 h90.55; Mechanical 31 "1.6 mm +/-10%" at 3756.14,29064.94 h90.55; Mechanical 31 "30.0 x 45.0 mm" at 3756.14,29222.42 h90.55; Mechanical 31 "210.2 x 205.4 mm" at 3756.14,29379.9 h90.55; Mechanical 31 "12 (4 x 3)" at 3756.14,29537.38 h90.55; Mechanical 31 "Allan" at 3756.14,29694.86 h90.55; Mechanical 31 "Silicon Labs" at 3756.14,30639.74 h90.55; Mechanical 31 "Page 1" at 5488.42,21190.92 h90.55; Mechanical 31 "Cu TRACK(TRACE)" at 2181.34,22450.77 h90.55; Mechanical 31 ":" at 3598.66,29222.42 h90.55; Mechanical 31 ":" at 3598.66,29379.9 h90.55; Mechanical 31 ":" at 3598.66,29537.38 h90.55; Mechanical 31 ":" at 3598.66,29694.86 h90.55; Mechanical 31 ":" at 3598.66,30009.82 h90.55; Mechanical 31 ":" at 3598.66,30167.3 h90.55; Mechanical 31 ":" at 3598.66,30482.26 h90.55; Mechanical 31 ":" at 3598.66,30639.74 h90.55; Mechanical 31 "<------------------------------------------------------------------------ 1(2)" at 2181.34,31112.18 h90.55; Mechanical 31 "*** PCB SPECIFICATION FOR BARE BOARD MANUFACTURING ***" at 2181.34,30954.7 h90.55; Mechanical 31 "-------------------------------------------------------------------------" at 2181.34,30797.22 h90.55; Mechanical 32 "L1 =====" at 3598.66,30324.78 h90.55; Mechanical 32 "TOP ====" at 3598.66,30639.74 h90.55; Mechanical 32 "| |// PREPREG or CORE ////// 300um" at 4307.32,30482.26 h90.55; Mechanical 32 "| |========================= 38 um Cu (ca) After plating" at 4307.32,30639.74 h90.55; Mechanical 32 "/////" at 3598.66,30482.26 h90.55; Mechanical 32 "| |========================= 18 um Cu (0.5 Oz)" at 4307.32,30324.78 h90.55; Mechanical 32 "| |// PREPREG or CORE //////" at 4307.32,30167.3 h90.55; Mechanical 32 "| |========================= 18 um Cu (0.5 Oz)" at 4307.32,30009.82 h90.55; Mechanical 32 "| |// PREPREG or CORE ////// 300um" at 4307.32,29852.34 h90.55; Mechanical 32 "| |========================= 38 um Cu (ca) After plating" at 4307.32,29694.86 h90.55; Mechanical 32 "<------------------------------------------------------------------------ 2(2)" at 2181.34,31112.18 h90.55; Mechanical 32 "/////" at 3598.66,30167.3 h90.55; Mechanical 32 "L2 =====" at 3598.66,30009.82 h90.55; Mechanical 32 "− − −" at 3598.66,29852.34 h90.55; Mechanical 32 "BOT ====" at 3598.66,29694.86 h90.55; Mechanical 32 "*)" at 3598.66,29379.9 h90.55; Mechanical 32 "The distance between Top-L1 and Bottom-L2 should be" at 3598.66,29222.42 h90.55; Mechanical 32 "as close to 300 um as possible!" at 3598.66,29064.94 h90.55; Mechanical 32 "**)" at 3598.66,28749.98 h90.55; Mechanical 32 "Select Center Prepreg thickness in order to reach specified" at 3598.66,28592.5 h90.55; Mechanical 32 "board thickness" at 3598.66,28435.02 h90.55; Mechanical 32 "100% Electrical Test" at 3756.14,27962.58 h90.55; Mechanical 32 "Optical test, AOI (with automatic scanner)" at 3756.14,27805.1 h90.55; Mechanical 32 "Visual inspection" at 3756.14,27647.62 h90.55; Mechanical 32 "(Generate netlist from Gerber and Drill files)" at 3756.14,27490.14 h90.55; Mechanical 32 "Avoid use of 2125 Prepreg" at 3756.14,27175.18 h90.55; Mechanical 32 "If NB! is used in this specification, it means:" at 3756.14,26860.22 h90.55; Mechanical 32 "abbreviation for nota bene!, a Latin expression meaning" at 3756.14,26702.74 h90.55; Mechanical 32 "note well!" at 3756.14,26545.25 h90.55; Mechanical 32 "--------------------------------------------------------------------------------" at 2181.34,26072.81 h90.55; Mechanical 32 "NC DRILL - HOLE INFORMATION:" at 2181.34,25932.73 h90.55; Mechanical 32 "Drill dimensions must be taken from the Excellon (.DRL) file(s), and" at 3126.22,25757.85 h90.55; Mechanical 32 "the drill report file(s) (.DRR)." at 3126.22,25600.37 h90.55; Mechanical 32 "NON-PLATED holes may have a small center marker in the Gerber files." at 3126.22,25442.89 h90.55; Mechanical 32 "Under no circumstance must these Gerber flashes be mistaken for the" at 3126.22,25285.41 h90.55; Mechanical 32 "hole drill dimensions!" at 3126.22,25127.93 h90.55; Mechanical 32 "The drill data may contain slots (in a separate file)." at 2181.34,24970.45 h90.55; Mechanical 32 "Dimensions for the finished board (after plating)." at 2181.34,24812.97 h90.55; Mechanical 32 "Tolerances +/- 0.1 mm, unless specified differently." at 2181.34,24655.49 h90.55; Mechanical 32 "Via Holes +0.05 mm/-Via Size, unless specified differently." at 2181.34,24498.01 h90.55; Mechanical 32 "--------------------------------------------------------------------------------" at 2181.34,24340.53 h90.55; Mechanical 32 "--------------------------------------------------------------------------------" at 2181.34,24183.05 h90.55; Mechanical 32 "BUILD UP" at 2181.34,30797.22 h90.55; Mechanical 32 ":" at 3598.66,30797.22 h90.55; Mechanical 32 ":" at 3598.66,27962.58 h90.55; Mechanical 32 "TEST" at 2181.34,27962.58 h90.55; Mechanical 32 "WARNING" at 2181.34,25757.85 h90.55; Mechanical 32 ":" at 2968.74,25757.85 h90.55; Mechanical 32 "Page 2" at 5488.42,21190.92 h90.55
P200: Mechanical 12 "40" at 1049.55,1183.73 h15.75 r180; Mechanical 12 "1" at 113.55,1105.73 h15.75 r180; Mechanical 12 "2" at 109.55,1185.73 h15.75 r180
P201: Mechanical 12 "40" at 1049.55,238.85 h15.75 r180; Mechanical 12 "1" at 113.55,160.85 h15.75 r180; Mechanical 12 "2" at 109.55,240.85 h15.75 r180